# EAGLE board PCB-SSB-2x4 (EAGLE 7.7.0)
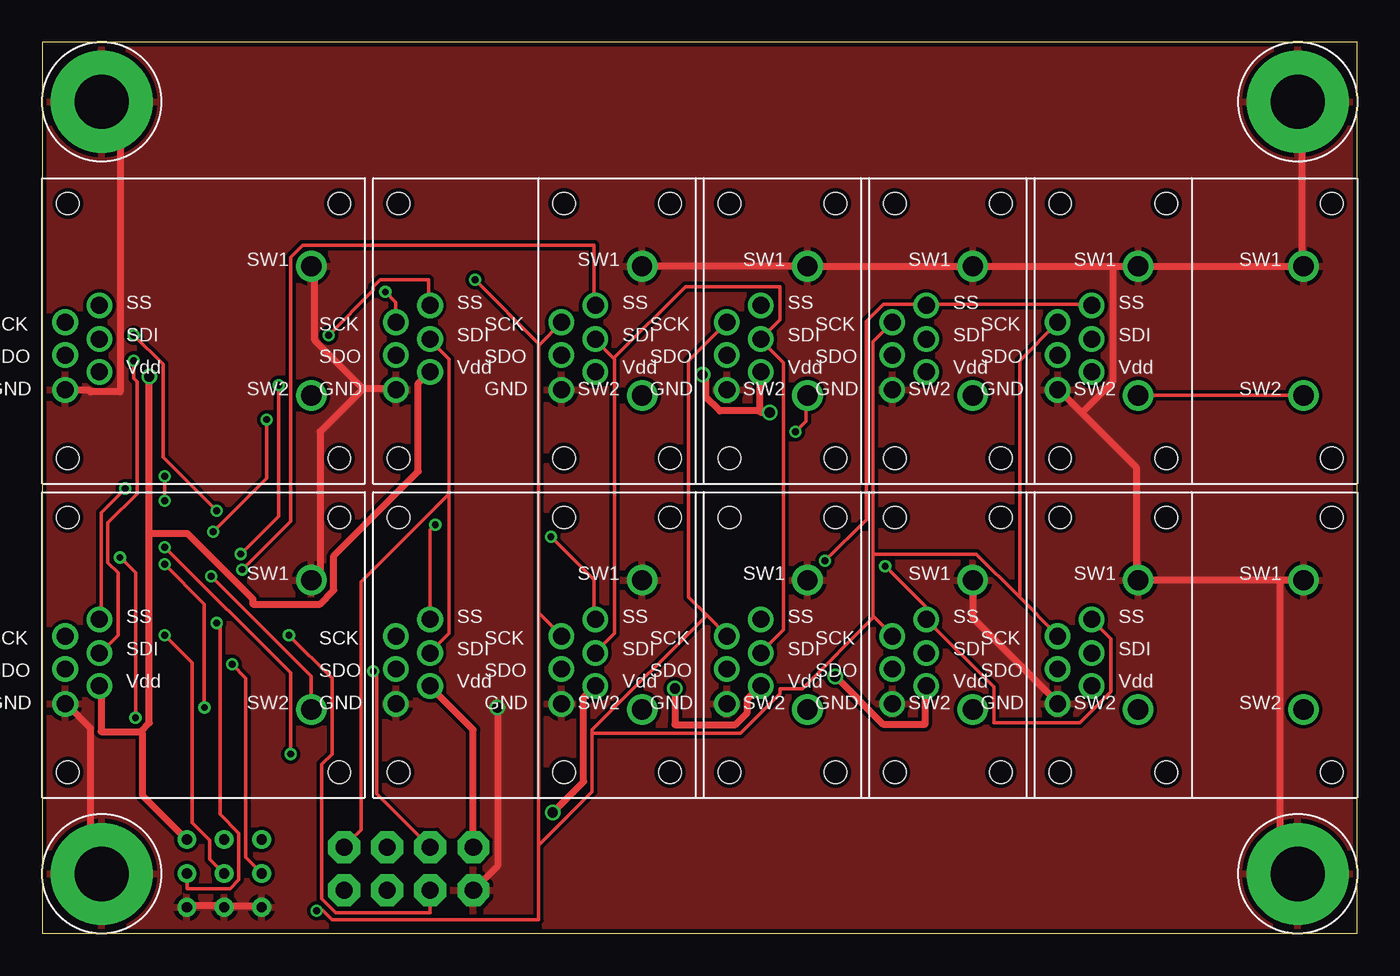
[diagram p0: board, top side]
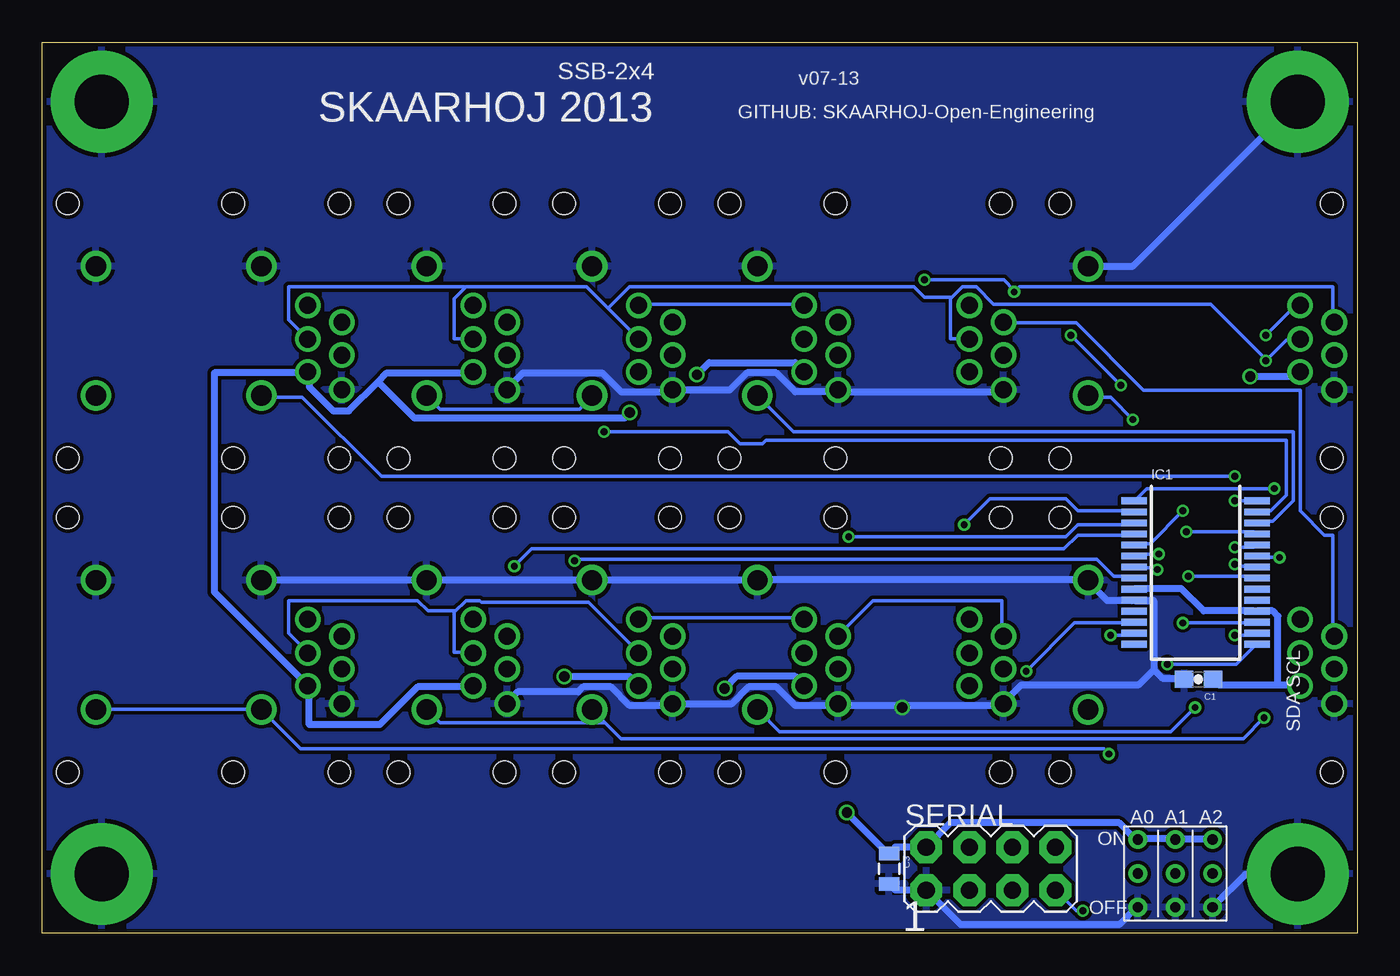
[diagram p1: board, bottom side, seen from below]

Size 77.5 x 52.5 mm. Coordinates in mm from the lower left corner, seen from the top.
Outline: 0,0 77.5,0 77.5,52.5 0,52.5 0,0
Copper layers (1*16): Top 0.035mm / dielectric 1.5mm / Bottom 0.035mm
Design rules "Fusion_eagle_rule_v1.1": minimum track width 6mil, minimum drill 12mil, track to track 6mil, track to pad 6mil, pad to pad 6mil, via to via 6mil, smd to smd 0mil, copper to edge 10mil, drill to drill 10mil, minimum pad ring 10mil, minimum via ring 6mil, stop-mask expansion 2mil, vias tented up to drill 100mil, thermal gap 10mil
Net classes: 0 default: width 0.203 mm, drill 0.406 mm, clearance 0.203 mm; 1 Power: width 0.406 mm, drill 0.61 mm, clearance 0.203 mm

## Footprints (pad centres in the part's own frame; a part is rotated, then mirrored left to right if it is on the bottom)
0603-CAP = smd 1.1 x 1: 1 -0.85,0; 2 0.85,0
0805 = smd 0.8 x 1.2: 1 -0.9,0; 2 0.9,0
SSOP28 = smd 0.4 x 1.5: 1 -4.225,-3.625; 2 -3.575,-3.625; 3 -2.925,-3.625; 4 -2.275,-3.625; 5 -1.625,-3.625; 6 -0.975,-3.625; 7 -0.325,-3.625; 8 0.325,-3.625; 9 0.975,-3.625; 10 1.625,-3.625; 11 2.275,-3.625; 12 2.925,-3.625; 13 3.575,-3.625; 14 4.225,-3.625; 15 4.225,3.625; 16 3.575,3.625; 17 2.925,3.625; 18 2.275,3.625; 19 1.625,3.625; 20 0.975,3.625; 21 0.325,3.625; 22 -0.325,3.625; 23 -0.975,3.625; 24 -1.625,3.625; 25 -2.275,3.625; 26 -2.925,3.625; 27 -3.575,3.625; 28 -4.225,3.625
2X4 = drill 1.016 pad 1.88 octagon: 1 -3.81,-1.27; 2 -3.81,1.27; 3 -1.27,-1.27; 4 -1.27,1.27; 5 1.27,-1.27; 6 1.27,1.27; 7 3.81,-1.27; 8 3.81,1.27
SMART_SWITCH = drill 1.2: 1 6.35,3.81; 2 6.35,-3.81 | drill 1: 3 -8.153,-3.48; 4 -6.147,-2.413; 5 -8.153,-1.422; 6 -6.147,-0.483; 7 -8.153,0.508; 8 -6.147,1.499 | hole 1.3: -8.001,7.506; 8.001,7.506; 8.001,-7.506; -8.001,-7.506
3.2MMPAD6MM = drill 3.2 pad 6: P$1 0,0
3BITADDR = drill 0.6: A0 -2.2,0; A1 0,0; A2 2.2,0; H1 -2.2,2; H2 0,2; H3 2.2,2; L1 -2.2,-2; L2 0,-2; L3 2.2,-2

## Placement (x,y rotation side)
C1  100nF  [0603-CAP]  9.35,14.96 0 bottom
C3  10uF  [0805]  27.58,3.81 270 bottom
IC1  MCP23017SS  [SSOP28]  9.53,21.26 270 bottom
SERIAL  M04X2  [2X4]  21.59,3.81 0 bottom
SSW1  SMART_SWITCHSMART_SWITCH_8PIN  [SMART_SWITCH]  9.5,17 0 top
SSW2  SMART_SWITCHSMART_SWITCH_8PIN  [SMART_SWITCH]  29,17 0 top
SSW3  SMART_SWITCHSMART_SWITCH_8PIN  [SMART_SWITCH]  48.5,17 0 top
SSW3ALT  SMART_SWITCHSMART_SWITCH_8PIN  [SMART_SWITCH]  38.75,17 0 top
SSW4  SMART_SWITCHSMART_SWITCH_8PIN  [SMART_SWITCH]  68,17 0 top
SSW4ALT  SMART_SWITCHSMART_SWITCH_8PIN  [SMART_SWITCH]  58.25,17 0 top
SSW5  SMART_SWITCHSMART_SWITCH_8PIN  [SMART_SWITCH]  9.5,35.5 0 top
SSW6  SMART_SWITCHSMART_SWITCH_8PIN  [SMART_SWITCH]  29,35.5 0 top
SSW7  SMART_SWITCHSMART_SWITCH_8PIN  [SMART_SWITCH]  48.5,35.5 0 top
SSW7ALT  SMART_SWITCHSMART_SWITCH_8PIN  [SMART_SWITCH]  38.75,35.5 0 top
SSW8  SMART_SWITCHSMART_SWITCH_8PIN  [SMART_SWITCH]  68,35.5 0 top
SSW8ALT  SMART_SWITCHSMART_SWITCH_8PIN  [SMART_SWITCH]  58.25,35.5 0 top
U$15  GNDPAD6MM  [3.2MMPAD6MM]  3.5,3.5 0 top
U$18  GNDPAD6MM  [3.2MMPAD6MM]  3.5,49 0 top
U$19  3BITADDR  [3BITADDR]  10.72,3.53 0 bottom
U$20  GNDPAD6MM  [3.2MMPAD6MM]  74,49 0 top
U$21  GNDPAD6MM  [3.2MMPAD6MM]  74,3.5 0 top

## Library data of the parts
C1 = SparkFun; SKAARHOJ_ID: SK_100nF
C3 = SparkFun; SKAARHOJ_ID: SK_10uF
IC1 = microchip; MF: MICROCHIP; MPN: MCP23017-E/SS; OC_FARNELL: 1467674; OC_NEWARK: 31K2960; SKAARHOJ_ID: SK_MCP23017
SERIAL = SparkFun; SKAARHOJ_ID: SK_2x4header
SSW1-SSW3 SSW3ALT SSW4 SSW4ALT SSW5-SSW7 SSW7ALT SSW8 SSW8ALT U$15 U$18-U$21 = SKAARHOJ

## Nets
5V [Power]: C1.2 C3.1 IC1.9 IC1.18 SERIAL.2 SSW1.4 SSW2.4 SSW3.4 SSW3ALT.4 SSW4.4 SSW4ALT.4 SSW5.4 SSW6.4 SSW7.4 SSW7ALT.4 SSW8.4 SSW8ALT.4 U$19.H1 U$19.H2 U$19.H3
A0: IC1.15 U$19.A0
A1: IC1.16 U$19.A1
A2: IC1.17 U$19.A2
DISP_DATA_OUT: SERIAL.6
GND [Power]: C1.1 C3.2 IC1.10 SERIAL.1 SSW1.1 SSW1.3 SSW2.1 SSW2.3 SSW3.1 SSW3.3 SSW3ALT.1 SSW3ALT.3 SSW4.1 SSW4.3 SSW4ALT.1 SSW4ALT.3 SSW5.1 SSW5.3 SSW6.1 SSW6.3 SSW7.1 SSW7.3 SSW7ALT.1 SSW7ALT.3 SSW8.1 SSW8.3 SSW8ALT.1 SSW8ALT.3 U$15.P$1 U$18.P$1 U$19.L1 U$19.L2 U$19.L3 U$20.P$1 U$21.P$1
GPA0: IC1.21 SSW1.2
GPA1: IC1.22 SSW2.2
GPA2: IC1.23 SSW3.2 SSW3ALT.2
GPA3: IC1.24 SSW4.2 SSW4ALT.2
GPA4: IC1.25 SSW5.2
GPA5: IC1.26 SSW6.2
GPA6: IC1.27 SSW7.2 SSW7ALT.2
GPA7: IC1.28 SSW8.2 SSW8ALT.2
GPB0: IC1.1 SSW1.8
GPB1: IC1.2 SSW2.8
GPB2: IC1.3 SSW3.8 SSW3ALT.8
GPB3: IC1.4 SSW4.8 SSW4ALT.8
GPB4: IC1.5 SSW5.8
GPB5: IC1.6 SSW6.8
GPB6: IC1.7 SSW7.8 SSW7ALT.8
GPB7: IC1.8 SSW8.8 SSW8ALT.8
I2C_SCL: IC1.12 SERIAL.4
I2C_SDA: IC1.13 SERIAL.3
SDI_MOSI: SERIAL.8 SSW1.6 SSW2.6 SSW3.6 SSW3ALT.6 SSW4.6 SSW4ALT.6 SSW5.6 SSW6.6 SSW7.6 SSW7ALT.6 SSW8.6 SSW8ALT.6
SDI_SCLK: SERIAL.7 SSW1.7 SSW2.7 SSW3.7 SSW3ALT.7 SSW4.7 SSW4ALT.7 SSW5.7 SSW6.7 SSW7.7 SSW7ALT.7 SSW8.7 SSW8ALT.7
SLIDER_IN: SERIAL.5

## Tracks (layer width: path | path; a pad name or v marks a point on that pad's centre or on a via)
5V  (via drill 0.61)
  Top 0.406: v46.74,15.14 49.58,12.29 52.02,12.29 52.02,14.53 SSW4ALT.4 | v38.91,32.92 39.12,32.72 39.12,31.6 39.93,30.79 42.27,30.79 | 42.27,30.79 42.27,33.02 SSW7.4 | v42.88,30.68 42.37,30.68 42.27,30.79 | SERIAL.2 25.4,11.99 22.86,14.53 SSW2.4 | v30.07,7.11 31.9,8.94 31.9,13.92 32.51,14.53 SSW3ALT.4 | 6.3,23.57 6.3,12.39 5.79,11.89 | 6.3,23.57 v6.3,32.82 | 5.79,11.89 3.45,11.89 3.45,14.53 SSW1.4 | 6.3,23.57 8.53,23.57 12.39,19.71 12.39,19.41 16.36,19.41 17.17,20.22 17.17,22.25 22.15,27.23 22.15,32.41 22.76,33.02 SSW6.4 | U$19.H3 8.43,5.59 5.89,8.13 5.89,11.79 5.79,11.89 | v37.29,14.43 37.29,12.29 40.84,12.29 41.55,13.01 41.55,13.82 42.27,14.53 SSW3.4
  Bottom 0.406: v46.74,15.14 42.88,15.14 42.37,14.63 SSW3.4 | SSW4ALT.4 52.12,14.53 55.37,14.53 57.61,12.29 61.77,12.29 61.77,14.53 SSW4.4 61.98,14.73 67.36,20.12 67.36,33.02 61.98,33.02 SSW8.4 61.77,33.02 61.77,32.21 60.35,30.79 59.44,30.79 57.71,32.51 | v38.91,32.92 38.2,33.63 33.12,33.63 32.61,33.12 SSW7ALT.4 | 57.71,32.51 57.2,33.02 52.12,33.02 SSW8ALT.4 | v42.88,30.68 43.18,30.38 55.58,30.38 57.71,32.51 | v30.07,7.11 27.74,4.78 C3.1 27.53,4.78 27.23,5.08 SERIAL.2 23.98,6.5 14.02,6.5 13.11,5.59 U$19.H1 12.9,5.59 10.87,5.59 U$19.H2 10.67,5.59 8.53,5.59 U$19.H3 | 4.67,14.63 3.45,14.63 SSW1.4 | 4.67,14.63 8.13,14.63 8.43,14.94 C1.2 | 4.67,14.63 4.67,18.69 4.98,19 5.89,19 IC1.18 6.1,19 9.04,19 10.36,20.32 13.11,20.32 IC1.9 | v6.3,32.82 3.66,32.82 3.45,33.02 SSW5.4 | v37.29,14.43 36.58,15.14 33.12,15.14 32.61,14.63 SSW3ALT.4
A0  (via drill 0.41)
  Top 0.203: v11.18,15.85 11.99,15.04 11.99,4.47 12.9,3.56 U$19.A0
  Bottom 0.203: v11.18,15.85 7.11,15.85 5.99,16.97 IC1.15
A1  (via drill 0.41)
  Top 0.203: v7.21,17.58 8.84,15.95 8.84,6.5 9.86,5.49 9.86,4.37 10.67,3.56 U$19.A1
  Bottom 0.203: v7.21,17.58 6.1,17.58 5.99,17.68 IC1.16
A2  (via drill 0.41)
  Top 0.203: v10.26,18.29 10.46,18.09 10.46,7.01 11.58,5.89 11.58,3.15 11.07,2.64 8.53,2.64 8.53,3.45 U$19.A2
  Bottom 0.203: v10.26,18.29 5.99,18.29 IC1.17
GND  (via drill 0.61)
  Top 0.406: SSW4.3 59.84,13.61 54.86,18.59 54.86,20.73 SSW3.1 | 61.27,30.68 64.52,27.43 64.52,20.83 SSW4ALT.1 64.72,20.83 72.95,20.83 | 61.27,30.68 59.94,32 SSW8.3 | 72.95,20.83 74.27,20.83 SSW4.1 | SSW6.1 45.01,39.32 SSW7ALT.1 45.21,39.32 54.76,39.32 SSW7.1 54.97,39.32 63.09,39.32 | 63.09,39.32 64.52,39.32 SSW8ALT.1 64.72,39.32 74.27,39.32 SSW8.1 74.27,39.52 74.27,48.77 74.07,48.97 U$20.P$1 | 61.27,30.68 63.09,32.51 63.09,39.32 | 72.95,20.83 72.95,4.57 73.97,3.56 U$21.P$1 | U$19.L3 8.53,1.63 10.67,1.63 U$19.L2 10.87,1.63 12.9,1.63 U$19.L1 | SSW1.3 1.42,13.51 2.85,12.09 2.85,4.17 3.45,3.56 U$15.P$1 | SSW5.3 1.42,32 2.74,32 2.85,31.9 4.57,31.9 4.57,47.95 3.56,48.97 U$18.P$1 | 18.9,32.11 16.05,34.95 16.05,39.12 15.95,39.22 SSW5.1 | 18.9,32.11 20.83,32.11 SSW6.3 | 18.9,32.11 16.36,29.57 16.36,21.23 15.95,20.83 SSW1.1 | SERIAL.1 26.82,3.96 v26.82,13.31
  Bottom 0.406: SSW4ALT.1 64.52,20.83 54.97,20.83 SSW3.1 54.76,20.83 45.21,20.83 SSW3ALT.1 45.01,20.83 35.36,20.83 SSW2.1 35.15,20.83 16.05,20.83 SSW1.1 15.85,20.73 14.73,19.61 13.31,19.61 IC1.10 13.11,19.61 11.99,19.61 11.99,15.54 | C3.2 27.53,2.85 27.23,2.54 SERIAL.1 23.37,0.51 14.02,0.51 13.01,1.52 U$19.L1 | U$19.L3 8.43,1.63 6.6,3.45 3.56,3.45 U$15.P$1 | 11.99,15.54 11.48,15.04 10.26,15.04 C1.1 | 11.99,15.54 12.9,14.63 19.81,14.63 20.83,13.61 SSW2.3 20.93,13.41 26.82,13.41 | 26.82,13.41 30.48,13.41 30.58,13.51 SSW3ALT.3 30.68,13.41 33.12,13.41 34.24,14.53 35.87,14.53 36.88,13.51 40.34,13.51 SSW3.3 40.44,13.41 42.88,13.41 43.99,14.53 45.62,14.53 45.92,14.22 49.48,14.22 50.09,13.61 SSW4ALT.3 | SSW8ALT.3 50.09,32.11 49.17,33.02 44.5,33.02 43.38,31.9 40.54,31.9 40.44,32 SSW7.3 40.23,32 36.98,32 35.97,33.02 34.24,33.02 33.12,31.9 30.68,31.9 SSW7ALT.3 30.58,32 30.48,31.9 21.03,31.9 20.93,32 SSW6.3 | U$18.P$1 3.56,48.97 13.21,39.32 SSW5.1 | v26.82,13.31 26.82,13.41
  pour Top: 0,0 77.47,0 77.47,52.7 0,52.7 0,0.64
  pour Bottom: 0,0 77.47,0 77.47,52.7 0,52.7
GPA0  (via drill 0.41)
  Top 0.203: v9.96,21.03 15.85,15.14 15.85,13.21 SSW1.2
  Bottom 0.203: v9.96,21.03 5.99,21.03 IC1.21
GPA1  (via drill 0.41)
  Top 0.203: v7.21,21.74 9.55,19.41 v9.55,13.31
  Bottom 0.203: v7.21,21.74 7.11,21.64 5.99,21.64 IC1.22 | v9.55,13.31 10.97,11.89 34.04,11.89 35.26,13.11 SSW2.2
GPA2  (via drill 0.41)
  Top 0.203: v4.57,22.15 5.49,21.23 v5.49,12.7
  Bottom 0.203: v4.57,22.15 5.89,22.15 IC1.23 | v5.49,12.7 6.71,11.48 43.38,11.48 44.35,12.45 | 44.35,12.45 45.01,13.11 SSW3ALT.2 | SSW3.2 54.76,13.11 54.05,12.39 44.4,12.39 44.35,12.45
GPA3  (via drill 0.41)
  Top 0.203: v7.21,22.76 14.63,15.34 v14.63,10.57
  Bottom 0.203: v7.21,22.76 6.1,22.76 5.99,22.86 IC1.24 | v14.63,10.57 14.94,10.87 62.28,10.87 64.52,13.11 SSW4ALT.2 64.62,13.21 74.27,13.21 SSW4.2
GPA4  (via drill 0.41)
  Top 0.203: v10.06,23.67 13.21,26.82 v13.21,30.28
  Bottom 0.203: v10.06,23.67 6.1,23.67 5.99,23.57 IC1.25 | v13.21,30.28 14.53,31.6 15.85,31.6 SSW5.2
GPA5
  Bottom 0.203: IC1.26 5.89,24.28 4.98,24.28 3.76,25.5 3.76,29.57 33.22,29.57 35.26,31.6 SSW6.2
GPA6  (via drill 0.41)
  Top 0.203: v44.4,29.57 45.01,30.18 45.01,31.6 SSW7ALT.2
  Bottom 0.203: v44.4,29.57 37.08,29.57 36.37,28.85 35.05,28.85 34.85,29.06 4.17,29.06 4.17,25.81 5.08,24.89 5.89,24.89 IC1.27 | SSW7.2 54.76,31.6 54.05,30.89 45.82,30.89 45.11,31.6 SSW7ALT.2
GPA7  (via drill 0.41)
  Top 0.203: v7.21,26.92 v7.21,25.5 | SSW8.2 74.27,31.7 64.62,31.7 SSW8ALT.2
  Bottom 0.203: v7.21,25.5 5.99,25.5 IC1.28 | v7.21,26.92 57.51,26.92 62.18,31.6 64.52,31.6 SSW8ALT.2
GPB0  (via drill 0.41)
  Top 0.203: v4.88,26.21 3.45,24.79 3.45,18.59 SSW1.8
  Bottom 0.203: v4.88,26.21 12.39,26.21 13.11,25.5 IC1.1
GPB1  (via drill 0.41)
  Top 0.203: v23.16,24.08 22.86,23.77 22.86,18.59 SSW2.8
  Bottom 0.203: v23.16,24.08 21.64,25.6 17.17,25.6 16.46,24.89 13.21,24.89 IC1.2
GPB2  (via drill 0.41)
  Top 0.203: v29.97,23.37 32.51,20.83 32.51,18.59 SSW3ALT.8
  Bottom 0.203: v29.97,23.37 17.17,23.37 16.46,24.08 13.31,24.08 13.21,24.18 IC1.3 | SSW3.8 42.27,18.59 32.61,18.59 SSW3ALT.8
GPB3  (via drill 0.41)
  Top 0.203: v49.68,21.64 52.02,19.3 52.02,18.59 SSW4ALT.8 52.12,18.49 56.08,14.53 56.08,12.39 61.16,12.39 62.99,14.22 62.99,17.37 61.87,18.49 SSW4.8
  Bottom 0.203: v49.68,21.64 48.67,22.66 17.27,22.66 16.46,23.47 13.21,23.47 IC1.4
GPB4  (via drill 0.41)
  Top 0.203: v10.26,24.89 7.11,28.04 7.11,33.53 v5.38,35.26
  Bottom 0.203: v10.26,24.89 12.19,22.96 13.11,22.96 IC1.5 | v5.38,35.26 3.66,36.98 3.45,36.98 SSW5.8
GPB5  (via drill 0.41)
  Top 0.203: v11.68,22.35 13.92,24.59 v13.92,32.31 | v16.87,35.26 19.51,37.9 19.51,38.1 19.91,38.51 22.76,38.51 22.76,37.08 SSW6.8
  Bottom 0.203: v11.68,22.35 13.01,22.35 13.11,22.25 IC1.6 | v16.87,35.26 v13.92,32.31
GPB6  (via drill 0.41)
  Top 0.203: v11.79,21.44 14.63,24.28 14.63,39.83 15.34,40.54 32.51,40.54 32.51,37.08 SSW7ALT.8
  Bottom 0.203: v11.79,21.44 11.89,21.54 13.11,21.54 IC1.7 | SSW7.8 42.27,37.08 32.61,37.08 SSW7ALT.8
GPB7  (via drill 0.41)
  Top 0.203: v46.13,21.95 48.56,24.38 48.56,36.07 49.58,37.08 52.02,37.08 SSW8ALT.8 52.12,37.08 61.77,37.08 SSW8.8
  Bottom 0.203: v46.13,21.95 46.02,22.05 15.34,22.05 14.33,21.03 13.21,21.03 IC1.8
I2C_SCL  (via drill 0.41)
  Top 0.203: v19.51,15.44 19.71,15.24 19.71,8.23 SERIAL.4
  Bottom 0.203: v19.51,15.44 16.66,18.29 13.21,18.29 IC1.12
I2C_SDA  (via drill 0.41)
  Top 0.203: v14.53,17.58 17.07,15.04 17.07,10.57 16.46,9.96 16.46,2.03 17.27,1.22 22.86,1.22 SERIAL.3
  Bottom 0.203: v14.53,17.58 13.31,17.58 13.21,17.68 IC1.13
SDI_MOSI  (via drill 0.41)
  Top 0.203: 33.68,33.88 32.61,34.95 SSW7ALT.6 | 33.68,33.88 33.73,33.83 33.73,17.68 32.61,16.56 SSW3ALT.6 | 33.68,33.88 37.9,38.1 43.48,38.1 43.48,36.17 42.37,35.05 SSW7.6 42.37,34.95 43.69,33.63 43.69,17.88 42.37,16.56 SSW3.6 | v5.38,33.73 5.38,32.72 5.59,32.51 5.59,25.91 3.86,24.18 3.86,21.84 4.47,21.23 4.47,17.58 3.45,16.56 SSW1.6 | 23.98,25.91 23.98,33.83 22.86,34.95 SSW6.6 | 23.98,25.91 23.98,17.68 22.86,16.56 SSW2.6 | SERIAL.8 18.8,6.1 18.8,20.73 23.98,25.91
  Bottom 0.203: 53.19,18.95 53.24,18.9 53.24,16.56 52.12,16.56 SSW4ALT.6 | 53.19,18.95 52.53,19.61 51.71,19.61 51.61,19.51 45.31,19.51 42.37,16.56 SSW3.6 | SSW4.6 61.87,16.56 62.99,17.68 62.99,19.61 55.37,19.61 54.76,19 53.24,19 53.19,18.95 | 44.15,36.83 45.41,38.1 52.53,38.1 52.58,38.05 | 44.15,36.83 42.37,35.05 SSW7.6 | 52.58,38.05 53.24,37.39 53.24,35.05 52.12,35.05 SSW8ALT.6 | SSW8.6 61.87,35.05 62.99,36.17 62.99,38.1 52.63,38.1 52.58,38.05 | SSW5.6 3.45,34.95 4.17,34.95 v5.38,33.73 5.38,33.83 8.64,37.08 21.44,37.08 22.45,38.1 23.27,38.1 23.93,37.44 | 23.93,37.44 23.98,37.39 23.98,35.05 22.86,35.05 SSW6.6 | 44.15,36.83 42.88,38.1 26.11,38.1 25.5,37.49 23.98,37.49 23.93,37.44
SDI_SCLK  (via drill 0.41)
  Top 0.203: v20.22,37.8 20.83,37.19 20.83,36.07 SSW6.7 | 49.02,18.64 48.97,18.69 48.97,22.35 | 49.02,18.64 50.09,17.58 SSW4ALT.7 | 48.97,22.35 48.97,34.85 50.09,35.97 SSW8ALT.7 | 57.56,19.86 55.07,22.35 48.97,22.35 | 57.56,19.86 59.84,17.58 SSW4.7 | SSW8.7 59.84,35.97 57.61,33.73 57.61,19.91 57.56,19.86 | 39.17,18.75 38.1,19.81 38.1,33.73 40.34,35.97 SSW7.7 | 39.17,18.75 40.34,17.58 SSW3.7 | 29.31,34.7 29.26,34.65 29.26,18.9 29.31,18.85 | 29.31,34.7 30.58,35.97 SSW7ALT.7 | 29.31,18.85 30.58,17.58 SSW3ALT.7 | v16.15,1.32 16.56,1.32 17.07,0.81 29.26,0.81 29.26,5.18 | 29.26,5.18 29.26,18.8 29.31,18.85 | 39.17,18.75 32.41,11.99 32.41,11.79 | 32.41,11.79 32.41,8.33 29.26,5.18 | 49.02,18.64 44.81,14.43 43.48,14.43 43.48,14.12 41.15,11.79 32.41,11.79 | 29.31,34.7 v25.5,38.51
  Bottom 0.203: SSW1.7 1.42,17.58 1.42,23.47 1.93,23.47 3.35,24.89 3.35,32 12.6,32 16.56,35.97 20.83,35.97 SSW6.7 | SSW5.7 1.42,36.07 1.42,38.1 19.91,38.1 v20.22,37.8 20.22,37.9 20.83,38.51 v25.5,38.51 | SSW2.7 20.93,17.58 20.93,19.61 28.55,19.61 30.58,17.58 SSW3ALT.7 | SERIAL.7 16.56,1.32 v16.15,1.32

## Text on the board
_bsilk: v07-13 | SSB-2x4 | GITHUB: SKAARHOJ-Open-Engineering | SKAARHOJ 2013 | SCL | SDA | 1